# Altium PCB PCB3.PcbDoc
Units mil, origin at the board's own origin, x right, y up, seen from the top; angles counter-clockwise.
Board outline 2126.15 x 984.42 mil, 2 copper layers (Top Layer, Bottom Layer); 6 components, 28 nets, 112 pads, 38 vias.
Unrouted connection lines stored in the file: 1.
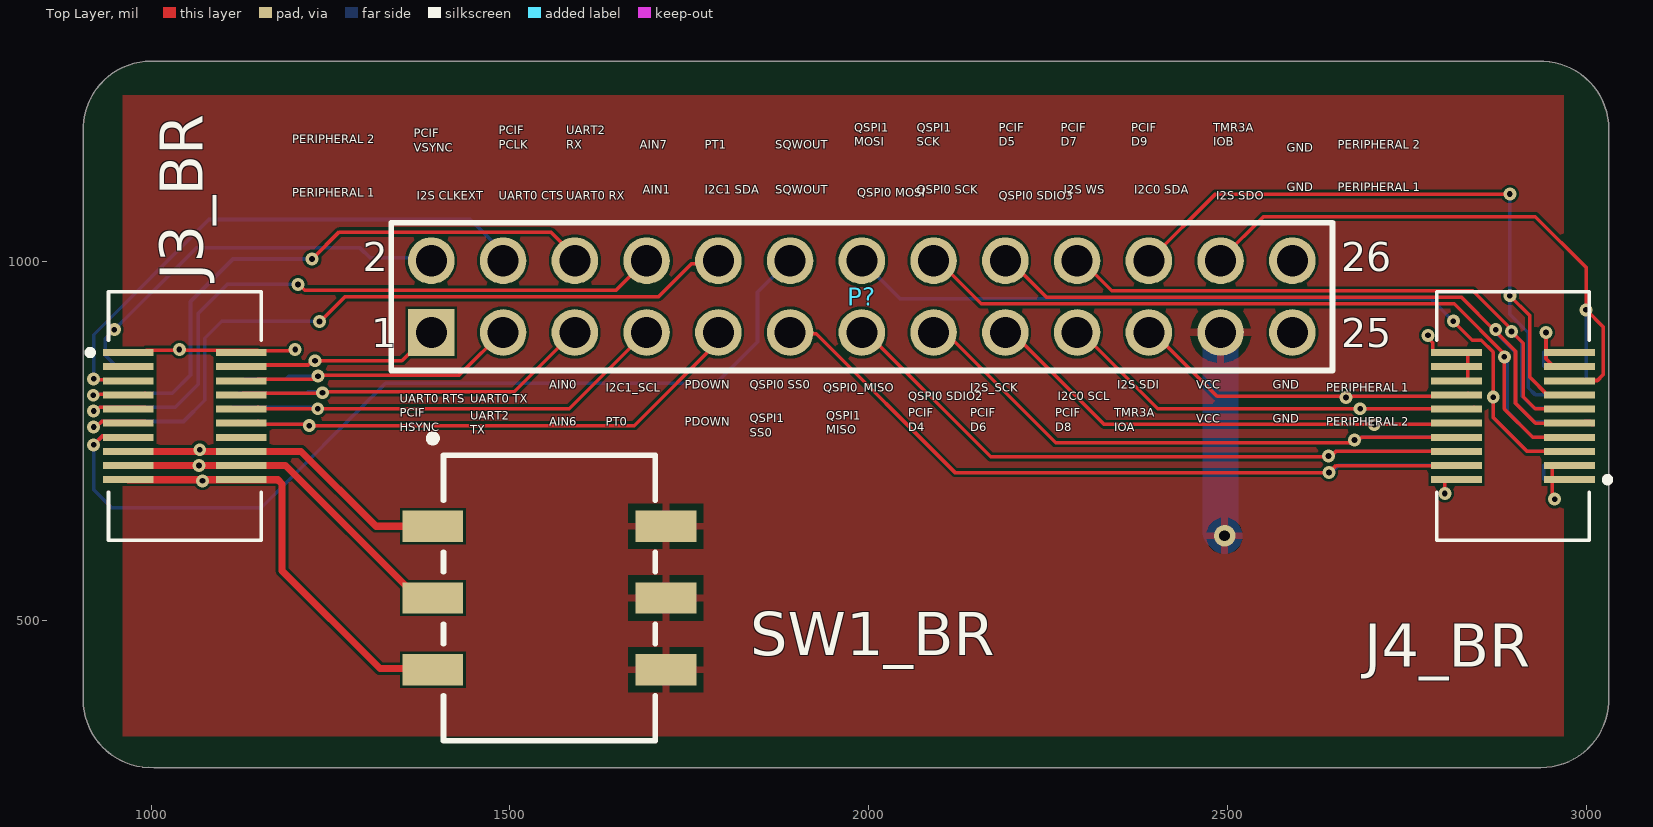
[diagram p0: Top Layer view]
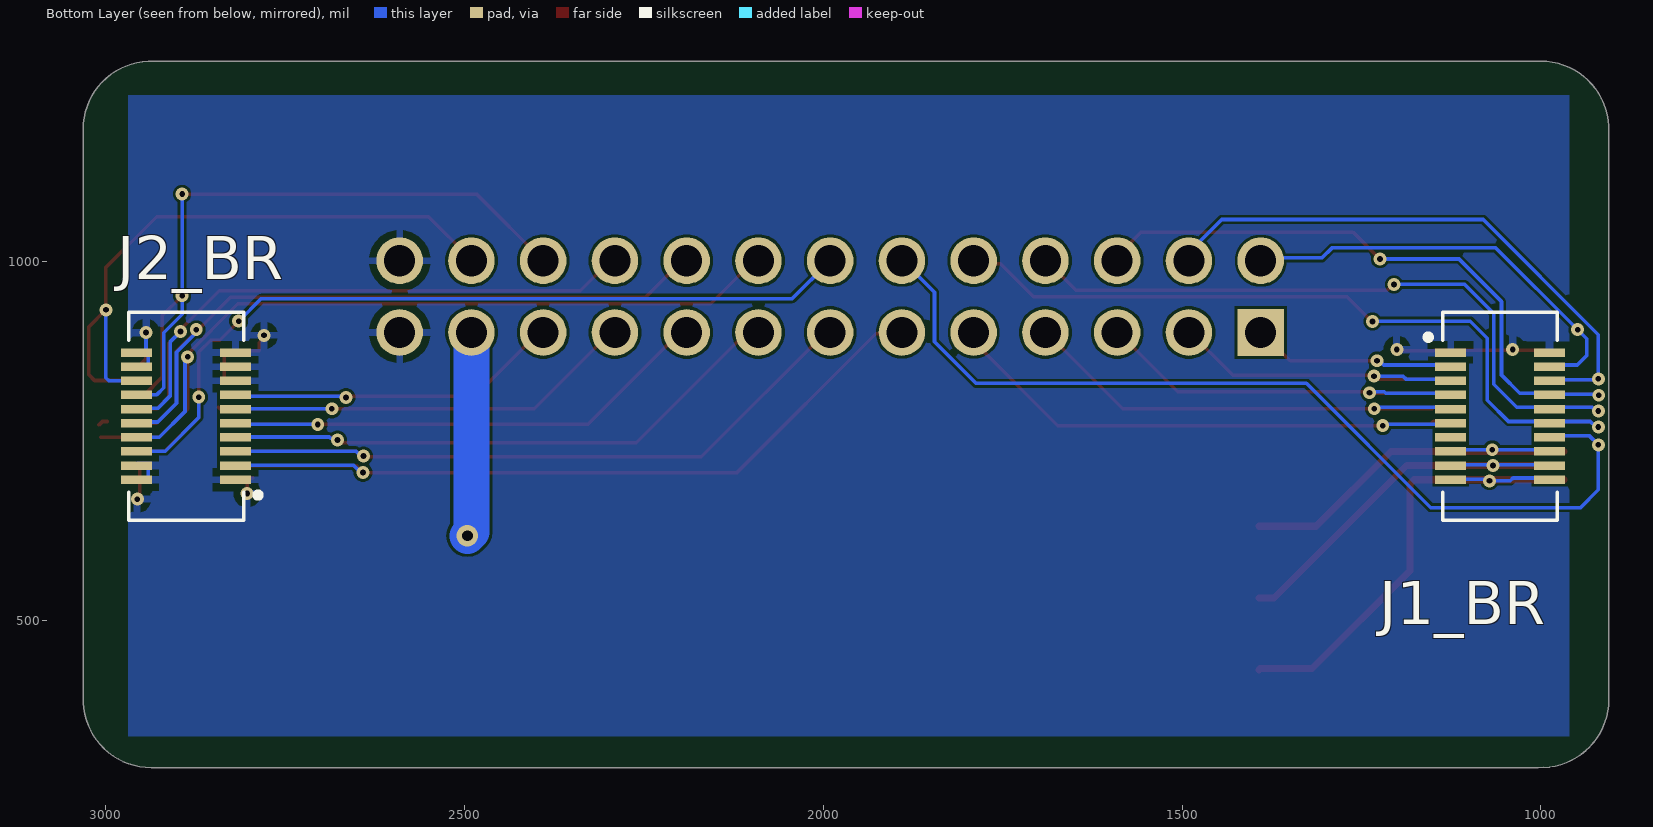
[diagram p1: Bottom Layer view, seen from below]
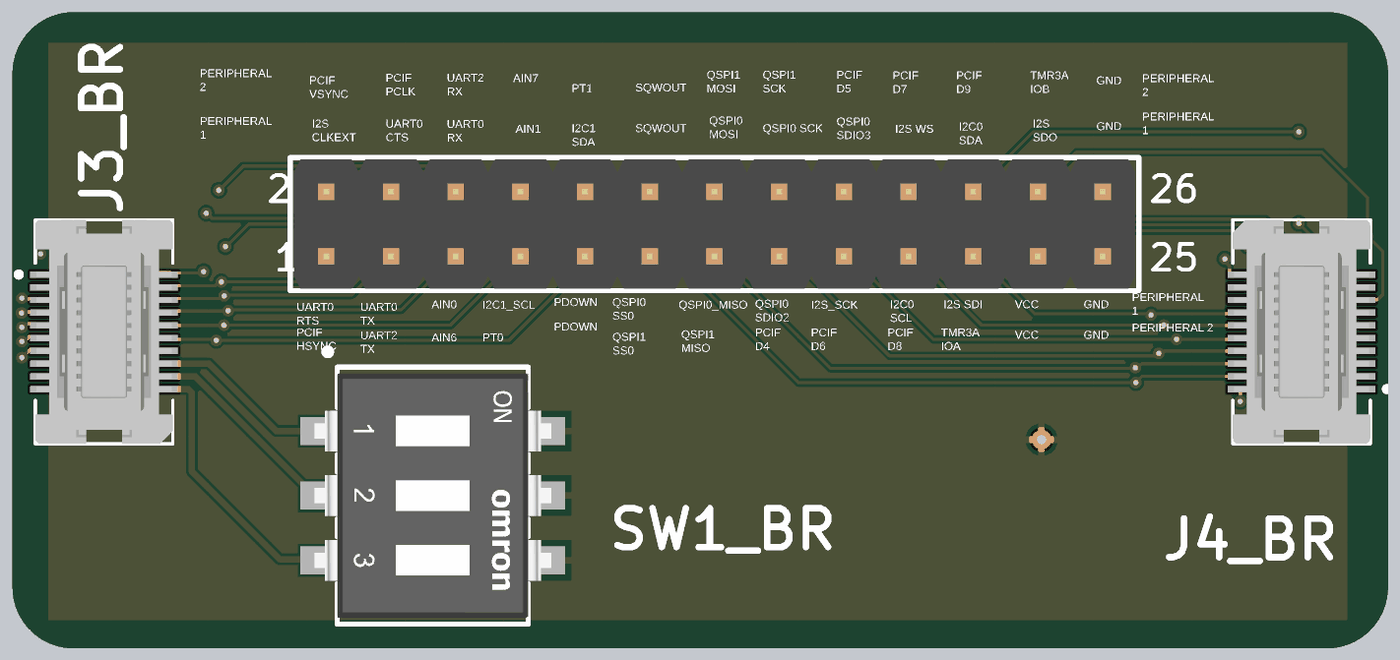
[diagram p2: 3D render of the assembled board from above, using the file's embedded part models]

## Layer stack, top to bottom
Top Solder: solder mask 0.4, Solder Resist, Dk 3.5
Top Layer: signal copper 1.4
Dielectric 1: dielectric 12.6, FR-4, Dk 4.8
Bottom Layer: signal copper 1.4
Bottom Solder: solder mask 0.4, Solder Resist, Dk 3.5

## Board outline
905.51,389.85 905.51,1181.1 cw(c1000,1185.04) 1000,1279.61 2932.99,1279.61 2933.07,1279.53 cw(c2937.01,1185.04) 3031.58,1185.04 3031.58,393.78 3031.5,393.7 cw(c2937.01,389.76) 2937.01,295.19 1004.02,295.19 1003.94,295.28 cw(c1000,389.76)

## Design rules (kind name [scope] priority, off if disabled: settings)
Clearance [All] p1: gap=4 ignorepadtopadclearanceinfootprint=FALSE
PolygonConnect [All] p1: connectstyle=Relief reliefconductorwidth=10 reliefentries=4 polygonreliefangle="90 Angle" airgapwidth=10
RoutingVias [All] p1: holewidth=8 width=18 viastyle="Through Hole" minholewidth=8 minwidth=18 maxholewidth=28 maxwidth=50
SolderMaskExpansion [All] p1: expansion=4 istentingtop=FALSE
Width [All] p1: maxlimit=50 minlimit=4 preferedwidth=5
30 further rules are at their usual default settings.

## Components (designator, comment, footprint, x,y, rotation, side; value= is the part's Value field where it differs from the comment)
J1_BR "53916-0208" "MOLEX-  539160208" 1047,785 r270 bottom
J2_BR "53916-0208" "MOLEX-  539160208" 2898,785 r90 bottom
J3_BR "52991-0208" MOLEX_52991-0208 1047,785 r270 top
J4_BR "52991-0208" MOLEX_52991-0208 2898,785 r90 top
P? "61302621121" 61302621121 1990.55,951.57 r0 top
SW1_BR "A6SN-3101" FP-A6SN-3101-MFG 1555.12,531.5 r270 top

## Footprints (in the part's own frame and the unit in brackets; to place one, negate y for a bottom-side part, rotate by r counter-clockwise, add the part's x,y. Pads: shape width x height; smd on the part's side, far side on the other; paste and mask are expansions set on the pad)
61302621121 [mm] "Pin Header, pitch 2.54 mm, THT, Vertical, dual row, 26p"
  rect 1.65x1.65 hole 1.1: 1(-15.24,-1.27)
  round 1.65 hole 1.1: 2(-15.24,1.27) 3(-12.7,-1.27) 4(-12.7,1.27) 5(-10.16,-1.27) 6(-10.16,1.27) 7(-7.62,-1.27) 8(-7.62,1.27) 9(-5.08,-1.27) 10(-5.08,1.27) 11(-2.54,-1.27) 12(-2.54,1.27) 13(0,-1.27) 14(0,1.27) 15(2.54,-1.27) 16(2.54,1.27) 17(5.08,-1.27) 18(5.08,1.27) 19(7.62,-1.27) 20(7.62,1.27) 21(10.16,-1.27) 22(10.16,1.27) 23(12.7,-1.27) 24(12.7,1.27) 25(15.24,-1.27) 26(15.24,1.27)
  silkscreen extent -16.66,-2.62 16.66,2.62, body extent -16.51,-2.54 16.51,2.54, height 8.59
FP-A6SN-3101-MFG [mm]
  rect 1.1x2.15 smd paste+0 mask+0: 1(-2.54,-4.125) 2(0,-4.125) 3(2.54,-4.125) 4(2.54,4.125) 5(0,4.125) 6(-2.54,4.125)
  silkscreen extent -5.77,-4.25 5.05,3.75, body extent -5.15,-5.3 5.15,5.3, height 0.25
"MOLEX-  539160208" [mm]
  rect 0.3x1.1 smd: 1(-2.25,1.5) 2(-2.25,-2) 3(-1.75,1.5) 4(-1.75,-2) 5(-1.25,1.5) 6(-1.25,-2) 7(-0.75,1.5) 8(-0.75,-2) 9(-0.25,1.5) 10(-0.25,-2) 11(0.25,1.5) 12(0.25,-2) 13(0.75,1.5) 14(0.75,-2) 15(1.25,1.5) 16(1.25,-2) 17(1.75,1.5) 18(1.75,-2) 19(2.25,1.5) 20(2.25,-2)
  silkscreen extent -3.68,-2.89 3.68,1.78, body extent -3.65,-2.3 3.65,1.8, height 3.46
MOLEX_52991-0208 [mm]
  rect 0.25x1.8 smd: 1(-2.25,-2) 2(-2.25,2) 3(-1.75,-2) 4(-1.75,2) 5(-1.25,-2) 6(-1.25,2) 7(-0.75,-2) 8(-0.75,2) 9(-0.25,-2) 10(-0.25,2) 11(0.25,-2) 12(0.25,2) 13(0.75,-2) 14(0.75,2) 15(1.25,-2) 16(1.25,2) 17(1.75,-2) 18(1.75,2) 19(2.25,-2) 20(2.25,2)
  silkscreen extent -4.4,-3.45 4.4,2.7, body extent -4.4,-2.7 4.4,2.7, height 2.28

## Part data
J3_BR J4_BR: "20 Position Connector Receptacle, Center Strip Contacts Surface Mount Gold", Package=None, Availability=Unavailable, MF=Molex, MP=52991-0208, Price=None, SnapEDA_Link=https://www.snapeda.com/parts/52991-0208/Molex/view-part/230631/?ref=snap
P?: library part CMP-1502-01114-1, "THT Vertical Pin Header WR-PHD, Pitch 2.54 mm, Dual Row, 26 pins", Contact Resistance=20mOhm, Manufacturer="Wurth Elektronik", Operating Temperature=-40to105degC, Rated Current=3A, Withstanding Voltage=500VAC, Working Voltage=250VAC, Datasheet URL=https://katalog.we-online.de/em/datasheet/6130xx21121.pdf, Gender=Male, Manufacturer URL=http://www.we-online.de, Mounting Technology=THT, Orientation=Vertical, Package Reference=61302621121, Packaging=Bag, Part Number=61302621121, Pin Number=26, Pitch=2.54mm, Publisher=WurthElektronik, Row Number=Dual
SW1_BR: library part CMP-08827-000007-1, "SWITCH SLIDE DIP SPST 25MA 24V", Ambient Temperature Range High=+85°C, Ambient Temperature Range Low=-30°C, Contact Resistance=200mΩ, Current Rating=25mA, Manufacturer="Omron Electronics Inc-EMC Div", Temperature="-30°C to +85°C", Voltage Rating Dc=24V, Automotive=No, Category=Switch, ComponentLink2Description=Datasheet, ComponentLink2URL=https://omronfs.omron.com/en_US/ecb/products/pdf/en-a6sn.pdf, Device Class L1=Electromechanical, Device Class L2=Switches, Device Class L3="DIP Switches", Digikey Description="SWITCH SLIDE DIP SPST 25MA 24V", Electromechanical Life=1000Cycles, Height=4.55mm, Lead Free=Yes, Manufacturer Part Number=A6SN-3101, Mouser Description="DIP Switches / SIP Switches 3P Knife-Edge, 2.3mm Slide SMT Flat-Act", Number Of Circuits=3, Octopart=https://octopart.com/a6sn-3101-omron-55396000, Package=A6SN-3101, RoHS=TRUE, Standoff Height=0.7mm, Temperature Range High=+85°C, Temperature Range Low=-30°C, Throw Configuration=SPST

## Via types
v1: diameter 18, hole 8, Top Layer to Bottom Layer, tented both sides, 20 vias
v2: diameter 18, hole 8, Top Layer to Bottom Layer, 17 vias
v3: diameter 30, hole 15, Top Layer to Bottom Layer, 1 vias

## Nets (pads, with @x,y where several pads share a name; then routed paths per layer and width w, separated by ;. In a path a pad name is that pad's centre, name@x,y a point inside that pad or via, vN(x,y) a via of type N, cw(c..) or ccw(c..) an arc to the next point about the centre after c; other vN are vias at no path point)
AIN6: J1_BR.8 J3_BR.8 P?.5 | length 644.1
  Top Layer w5: J3_BR.8 1128.16,816.95 1161.45,816.95 1161.6,817.11 1238.01,817.11 v1@1238.62,817.71 ; v1(1238.79,817.53) 1240.16,818.9 1506.3,818.9 P?.5@1607.92,920.51
  Bottom Layer w5: J1_BR.8@1122.05,816.93 1216.41,816.93 1218.38,818.9 1237.43,818.9 v1(1238.79,817.53)
AIN7: J1_BR.9 J3_BR.9 P?.8 | length 988.9
  Top Layer w5: 928.76,797.24 J3_BR.9@992.13,797.24 ; v1(1204.72,968.5) 1206.28,968.5 1214.15,960.63 1648.03,960.63 P?.8@1692.91,1005.51
  Bottom Layer w5: v1(920,792) 923.52,792 928.76,797.24 1033.46,797.24 1065.8,829.58 1065.8,928.01 1106.3,968.5 v1(1204.72,968.5)
GND: J1_BR.1 J1_BR.2 J2_BR.1 J2_BR.2 J2_BR.3 J2_BR.16 J2_BR.17 J2_BR.18 J2_BR.19 J2_BR.20 J3_BR.1 J3_BR.2 J4_BR.1 J4_BR.2 J4_BR.3 J4_BR.16 J4_BR.17 J4_BR.18 J4_BR.19 J4_BR.20 P?.25 P?.26 | length 531.9
  Top Layer w5: J3_BR.1@992.13,875.98 993.11,876.97 1038.39,876.97 v2(1039.37,877.95) 1040.35,876.97 1148.62,876.97 1149.61,875.98 1198.82,875.98 v2(1200.79,877.95) ; v2(2779.53,897.64) 2779.53,894.12 2786.33,887.32 2786.33,876 2786.37,875.96 J4_BR.20@2835.24,875.96 ; J4_BR.2@2795.28,698.82 2800.73,698.82 2803.15,696.4 v2(2803.15,677.17) ; J4_BR.16@2835.26,834.65 J4_BR.20@2835.26,875.98 ; v2(2944.07,901.57) 2944.16,901.49 2944.16,864.9 J4_BR.17@2952.76,856.3 ; J4_BR.3@2952.76,718.5 2952.76,672.65 v2(2956.16,669.24)
  Bottom Layer w5: J2_BR.1@2940.94,696.85 J2_BR.3@2940.94,716.54 ; J2_BR.17@2940.94,854.33 J2_BR.19@2940.94,874.02 ; v2(2944.07,901.57) 2944.07,876.99 2947.48,873.58 J2_BR.19
I2C0_SCL: J2_BR.12 J4_BR.12 P?.19 | length 715.5
  Top Layer w5: P?.19@2292.91,905.51 2403.15,795.28 v1(2685.04,795.28) 2685.26,795.06 2841.24,795.06 J4_BR.12@2843.42,797.24
  Bottom Layer w5: v1(2685.04,795.28) 2685.26,795.06 2802.93,795.06 J2_BR.12@2803.15,795.28
I2C0_SDA: J2_BR.13 J4_BR.13 P?.22 | length 1054.4
  Top Layer w5: P?.22 2483.46,1094.49 v1(2893.7,1094.49) ; v1(2893.7,952.76) 2921.26,925.2 2921.26,839.5 2946.23,814.53 J4_BR.13
  Bottom Layer w5: v1(2893.7,1094.49) v1(2893.7,952.76) 2893.7,927.03 2919.57,901.16 2919.57,824.52 2929.57,814.53 J2_BR.13
I2C1_SCL: J1_BR.10 J3_BR.10 P?.7 | length 709.3
  Top Layer w5: J3_BR.10@1149.61,797.24 1151.79,795.06 1232.07,795.06 v1(1232.28,795.28) 1582.68,795.28 P?.7@1692.91,905.51
  Bottom Layer w5: J1_BR.10@1113.74,797.24 1230.32,797.24 v1(1232.28,795.28)
I2C1_SDA: J1_BR.11 J3_BR.11 P?.10 | length 1098.6
  Top Layer w5: v1(920,770) 923.52,770 931.08,777.56 J3_BR.11@992.13,777.56 ; v2(1234.74,916.8) 1235.69,916.8 1270.53,951.63 1707.54,951.63 1753.5,997.59 1785,997.59 P?.10@1792.91,1005.51
  Bottom Layer w5: v1(920,770) 923.52,770 931.08,777.56 1045.28,777.56 1074.8,807.09 1074.8,893.7 1098.43,917.32 v2@1236.7,917.32
I2S_CLKEXT: J1_BR.3 J3_BR.3 P?.2 | length 578.7
  Bottom Layer w5: J1_BR.3@970.94,856.3 949.29,856.3 936.06,869.53 936.06,892.76 v1(948.82,905.51) 1062.74,1019.44 1291.17,1019.44 1305.1,1005.51 P?.2@1392.91,1005.51
I2S_SCK: J2_BR.10 J4_BR.10 P?.17 | length 793.7
  Top Layer w5: P?.17@2192.91,909.07 2328.58,773.41 v1(2704.72,773.37) J4_BR.10@2831.11,773.41
  Bottom Layer w5: v1@2704.76,773.41 2800.96,773.41 J2_BR.10@2803.15,775.59
I2S_SDI: J2_BR.14 J4_BR.14 P?.21 | length 644.4
  Top Layer w5: P?.21@2376.97,921.45 2485.65,812.78 2831.11,812.78 J4_BR.14@2835.26,816.93
  Bottom Layer w5: v1(2665.35,811.02) 2667.11,812.78 2800.96,812.78 J2_BR.14@2803.15,814.96
I2S_SDO: J2_BR.15 J4_BR.15 P?.24 | length 909.2
  Top Layer w5: P?.24@2492.91,1005.51 2550.39,1062.99 2929.13,1062.99 3000,992.13 v2(3000,933.07) 3023.62,909.45 3023.62,842.52 3015.75,834.65 2977.17,834.65 J4_BR.15
  Bottom Layer w5: J2_BR.15 2995.63,834.21 3000,838.58 v2(3000,933.07)
I2S_WS: J2_BR.11 J4_BR.11 P?.20 | length 968.7
  Top Layer w5: P?.20@2292.91,1005.51 2338.89,959.54 2841.91,959.54 2895.47,905.98 2895.47,903.34 2912.26,886.55 2912.26,812.15 2929.13,795.28 2976.31,795.28 J4_BR.11
  Bottom Layer w5: v2(2895.87,902.95) 2910.57,888.24 2910.57,813.04 2927.9,795.71 2959.27,795.71 J2_BR.11@2959.71,795.28
PDOWN: J1_BR.12 J3_BR.12 P?.9 | length 806.5
  Top Layer w5: J3_BR.12@1149.61,777.56 1153.76,773.41 1218.72,773.41 v1(1220.47,771.65) 1673.23,771.65 1792.91,891.34 P?.9@1792.91,905.51
  Bottom Layer w5: J1_BR.12@1125.74,777.16 1129.49,773.41 1218.72,773.41 v1(1220.47,771.65)
QSPI0_MISO: J2_BR.6 J4_BR.6 P?.13 | length 1067.5
  Top Layer w5: P?.13@1992.91,905.51 2170.08,728.35 2639.92,728.35 v1(2641.01,729.43) ; v1@2641.73,728.35 2643.72,728.35 2651.16,735.79 J4_BR.6
  Bottom Layer w5: v1(2641.01,729.43) 2644.53,729.43 2651.31,736.22 J2_BR.6@2803.15,736.22
QSPI0_MOSI: J2_BR.5 J4_BR.5 P?.14 | length 1303.5
  Top Layer w5: v2(2814.96,917.32) 2841.4,890.88 2854,890.88 2870.57,874.3 v2(2870.57,811.44) 2870.57,808.69 2870.57,782.97 2917.76,735.79 J4_BR.5
  Bottom Layer w5: P?.14@1992.91,1005.51 1992.91,999.21 2043.31,948.82 2783.46,948.82 v2(2814.96,917.32) ; v2(2870.57,811.44) 2870.57,782.97 2917.32,736.22 2956.62,736.22 J2_BR.5 2941.38,735.79 J2_BR.5@2940.94,736.22
QSPI0_SCK: J2_BR.7 J4_BR.7 P?.16 | length 1221.9
  Top Layer w5: P?.16@2092.91,1005.51 2156.89,941.54 2816.07,941.54 v2@2888.04,869.56 ; v2(2886.07,867.6) 2886.07,795.03 2925.63,755.47 J4_BR.7@3007.25,755.47
  Bottom Layer w5: v2(2886.07,867.6) 2886.83,867.6 2889.76,864.67 2889.76,791.34 2925.63,755.47 J2_BR.7
QSPI0_SDIO2: J2_BR.8 J4_BR.8 P?.15 | length 930.4
  Top Layer w5: P?.15@2092.91,915.94 2260.82,748.03 2679.15,748.03 2686.59,755.47 J4_BR.8 ; v1@2677.17,748.03 v1(2677.17,751.72)
  Bottom Layer w5: v1(2677.17,751.72) 2679.65,754.21 2686.86,754.21 2688.56,755.91 J2_BR.8@2803.15,755.91
QSPI0_SDIO3: J2_BR.9 J4_BR.9 P?.18 | length 1116.4
  Top Layer w5: P?.18@2192.91,1005.51 2247.89,950.54 2826.35,950.54 v2@2872.7,904.19 ; v2(2874.02,905.51) 2874.02,902.88 2901.57,875.32 2901.57,803.15 2929.57,775.16 J4_BR.9 ; J4_BR.9@2998.45,777.56 3004.85,777.56 J4_BR.9@3009.67,772.74
  Bottom Layer w5: v2(2874.02,905.51) 2874.02,901.57 2901.57,874.02 2901.57,803.15 2927.9,776.82 2955.39,776.82 J2_BR.9
QSPI0_SS0: J2_BR.4 J4_BR.4 P?.11 | length 1178.5
  Top Layer w5: P?.11@1892.91,905.51 1898.67,899.76 1927.01,899.76 2120.43,706.35 v1(2641.73,706.35) 2651.49,716.1 J4_BR.4
  Bottom Layer w5: v1(2641.73,706.35) 2644.69,706.35 2654.88,716.54 J2_BR.4@2803.15,716.54
SQWOUT: J1_BR.13 J3_BR.13 P?.12 | length 1371.6
  Top Layer w5: v1@920,747.3 v1(920,745) 932.87,757.87 J3_BR.13@992.13,757.87
  Bottom Layer w5: J1_BR.13@975.94,757.87 932.87,757.87 v1(920,745) 920,682.36 944.88,657.48 1153.54,657.48 1326.77,830.71 1787.4,830.71 1845.2,888.51 1845.2,957.8 P?.12@1892.91,1005.51
UART0_CTS: J1_BR.5 J3_BR.5 P?.4 | length 844.9
  Top Layer w5: v1(920,837) 921.39,835.61 966.87,835.61 J3_BR.5
  Bottom Layer w5: J1_BR.5 986.55,835.61 921.39,835.61 v1(920,837) 920,898.61 1080.44,1059.06 1444.88,1059.06 1492.91,1011.02 P?.4@1492.91,1005.51
UART0_RTS: J1_BR.4 J3_BR.4 P?.1 | length 385.7
  Top Layer w5: J3_BR.4@1149.61,856.3 1218.92,856.3 1224.83,862.2 v1(1228.35,862.2) 1349.61,862.2 P?.1@1392.91,905.51
  Bottom Layer w5: J1_BR.4@1108.74,856.3 1218.92,856.3 1224.83,862.2 v1(1228.35,862.2)
UART0_RX: J1_BR.7 J3_BR.7 P?.6 | length 918.1
  Top Layer w5: v1(919.35,814.07) 920.78,815.5 990.7,815.5 J3_BR.7@992.13,816.93 ; v2(1224.41,1003.94) 1262.01,1041.54 1556.89,1041.54 P?.6@1592.91,1005.51
  Bottom Layer w5: v1@920.4,813.01 v1(919.35,814.07) 920.78,815.5 998.57,815.5 1000,816.93 1029.53,816.93 1054.87,842.27 1054.87,944.63 1114.17,1003.94 v2(1224.41,1003.94)
UART0_TX: J1_BR.6 J3_BR.6 P?.3 | length 476.2
  Top Layer w5: J3_BR.6@1149.61,836.61 1225.13,836.61 1229.14,840.63 v1(1232.66,840.63) 1233.8,841.77 1429.17,841.77 P?.3@1492.91,905.51
  Bottom Layer w5: J1_BR.6@1129.92,836.61 1188.09,836.61 1192.11,840.63 v1(1232.66,840.63)
VCC: P?.23 SW1_BR.4 SW1_BR.5 SW1_BR.6 | length 285.7
  Bottom Layer w50: P?.23 2490.55,623.62 v3(2496.06,618.11)
VCC_1: J1_BR.15 J1_BR.16 J3_BR.15 J3_BR.16 SW1_BR.1 | length 599.1
  Top Layer w10: J3_BR.15 1065.45,735.79 v2(1067.85,738.19) 1070.25,735.79 1209.09,735.79 1313.39,631.5 SW1_BR.1
  Bottom Layer w5: J1_BR.15@984.25,738.19 v2(1067.85,738.19) J1_BR.16@1113.74,738.19
VCC_2: J1_BR.17 J1_BR.18 J3_BR.17 J3_BR.18 SW1_BR.2 | length 609.6
  Top Layer w10: J3_BR.17@998.69,716.18 J3_BR.17@1001.73,716.18 ; J3_BR.18@1125.63,716.22 v2(1066.74,716.22) J3_BR.17@1001.77,716.22 ; J3_BR.18 1187.44,716.1 1372.05,531.5 SW1_BR.2 ; J3_BR.17@1001.73,716.18 J3_BR.17@1001.77,716.22
  Bottom Layer w5: J1_BR.17@975.94,717.36 1065.59,717.36 v2(1066.74,716.22) 1067.88,717.36 1112.6,717.36 J1_BR.18@1113.74,718.5
VCC_3: J1_BR.19 J1_BR.20 J3_BR.19 J3_BR.20 SW1_BR.3 | length 738.5
  Top Layer w10: J3_BR.19 1068.05,696.42 1069.65,694.81 1073.98,694.81 1075.59,696.42 J3_BR.20 1176.68,696.42 1182.54,690.56 1182.54,569.43 1318.9,433.07 1391.14,433.07 SW1_BR.3
  Bottom Layer w5: J1_BR.19@984.25,698.82 1038.78,698.82 1042.78,694.81 v2(1071.82,694.81) 1073.82,696.82 J1_BR.20@1113.74,696.82
pads on no net: J1_BR.14 J3_BR.14

## Polygon pours and split planes (outlines as drawn)
VCC on Top Layer "VCC_L01_P002" (solid, pour order 2): 960.63,1232.28 960.63,338.58 2968.5,338.58 2968.5,1232.28
GND on Bottom Layer "GND_L02_P003" (solid, pour order 3): 2968.5,338.58 2968.5,1232.28 960.63,1232.28 960.63,338.58

## Silkscreen, mask and mechanical layers (free items; w line width, h text height)
Top Overlay:
  text "PERIPHERAL 2" at 1196.85,1161.42 h20
  text "QSPI1 / MOSI" at 1980.31,1157.48 h20
  text "QSPI1 / SCK" at 2066.93,1157.48 h20
  text "PCIF / D5" at 2181.1,1157.48 h20
  text "PCIF / D7" at 2267.72,1157.48 h20
  text "PCIF / D9" at 2366.14,1157.48 h20
  text "TMR3A / IOB" at 2480.31,1157.48 h20
  text "PCIF / PCLK" at 1484.25,1153.54 h20
  text "UART2 / RX" at 1578.74,1153.54 h20
  text "AIN7" at 1681.1,1153.54 h20
  text "PT1" at 1771.65,1153.54 h20
  text "SQWOUT" at 1870.08,1153.54 h20
  text "PERIPHERAL 2" at 2653.54,1153.54 h20
  text "PCIF / VSYNC" at 1366.14,1149.61 h20
  text "GND" at 2582.68,1149.61 h20
  text "GND" at 2582.68,1094.49 h20
  text "PERIPHERAL 1" at 2653.54,1094.49 h20
  text "AIN1" at 1685.04,1090.55 h20
  text "I2C1 SDA" at 1771.65,1090.55 h20
  text "SQWOUT" at 1870.08,1090.55 h20
  text "QSPI0 SCK" at 2066.93,1090.55 h20
  text "I2S WS" at 2271.65,1090.55 h20
  text "I2C0 SDA" at 2370.08,1090.55 h20
  text "PERIPHERAL 1" at 1196.85,1086.61 h20
  text "QSPI0 MOSI" at 1984.25,1086.61 h20
  text "I2S CLKEXT" at 1370.08,1082.68 h20
  text "UART0 CTS" at 1484.25,1082.68 h20
  text "UART0 RX" at 1578.74,1082.68 h20
  text "QSPI0 SDIO3" at 2181.1,1082.68 h20
  text "I2S SDO" at 2484.25,1082.68 h20
  text "AIN0" at 1555.12,818.9 h20
  text "PDOWN" at 1744.09,818.9 h20
  text "QSPI0 SS0" at 1834.65,818.9 h20
  text "I2S SDI" at 2346.46,818.9 h20
  text "VCC" at 2456.69,818.9 h20
  text "GND" at 2562.99,818.9 h20
  text "I2C1_SCL" at 1633.86,814.96 h20
  text "QSPI0_MISO" at 1937.01,814.96 h20
  text "I2S_SCK" at 2141.73,814.96 h20
  text "PERIPHERAL 1" at 2637.8,814.96 h20
  text "QSPI0 SDIO2" at 2055.12,803.15 h20
  text "I2C0 SCL" at 2263.78,803.15 h20
  text "UART0 RTS" at 1346.46,799.21 h20
  text "UART0 TX" at 1444.88,799.21 h20
  text "VCC" at 2456.69,771.65 h20
  text "GND" at 2562.99,771.65 h20
  text "AIN6" at 1555.12,767.72 h20
  text "PT0" at 1633.86,767.72 h20
  text "PDOWN" at 1744.09,767.72 h20
  text "PERIPHERAL 2" at 2637.8,767.72 h20
  text "PCIF / HSYNC" at 1346.46,759.84 h20
  text "PCIF / D4" at 2055.12,759.84 h20
  text "PCIF / D6" at 2141.73,759.84 h20
  text "PCIF / D8" at 2259.84,759.84 h20
  text "TMR3A / IOA" at 2342.52,759.84 h20
  text "UART2 / TX" at 1444.88,755.91 h20
  text "QSPI1 / MISO" at 1940.94,755.91 h20
  text "QSPI1 / SS0" at 1834.65,751.97 h20
Mechanical 1:
  lines w10: 1003.28,290.25 ccw(c1004.02,295.19) 1004.02,290.19 ; 1003.28,290.25 cw(c1000,389.76) 900.43,389.76 cw(c905.43,389.76) 900.51,390.67 900.51,1181 cw(c1000,1185.04) 1000,1284.61 2932.99,1284.61 ; 1003.28,290.25 ccw(c1004.02,295.19) 1004.02,290.19 ; 1004.02,290.19 2937.01,290.19 ccw(c2937.01,389.76) 3036.58,389.76 ccw(c2937.01,389.76) 3036.52,393.05 ; 2932.99,1284.61 cw(c2932.99,1279.61) 2933.72,1284.56 ; 2932.99,1284.61 cw(c2932.99,1279.61) 2933.72,1284.56 ; 2933.72,1284.56 cw(c2937.01,1185.04) 3036.58,1185.04 3036.58,393.78 ; 3036.52,393.05 ccw(c3031.58,393.78) 3036.58,393.78 ; 3036.52,393.05 ccw(c3031.58,393.78) 3036.58,393.78

## Text inside footprints (layer, text, board x,y; h text height)
P?: Top Overlay "26" at 2658.66,987.01 h40; Top Overlay "25" at 2658.66,880.71 h40; Top Overlay "1" at 1306.69,880.71 h40; Top Overlay "2" at 1294.88,987.01 h40